# Altium PCB FeedbackCC2.PcbDoc
Units mm, origin at the board's own origin, x right, y up, seen from the top; angles counter-clockwise.
Board outline 40 x 35 mm, 2 copper layers (Top Layer, Bottom Layer); 19 components, 17 nets, 48 pads, 5 vias.
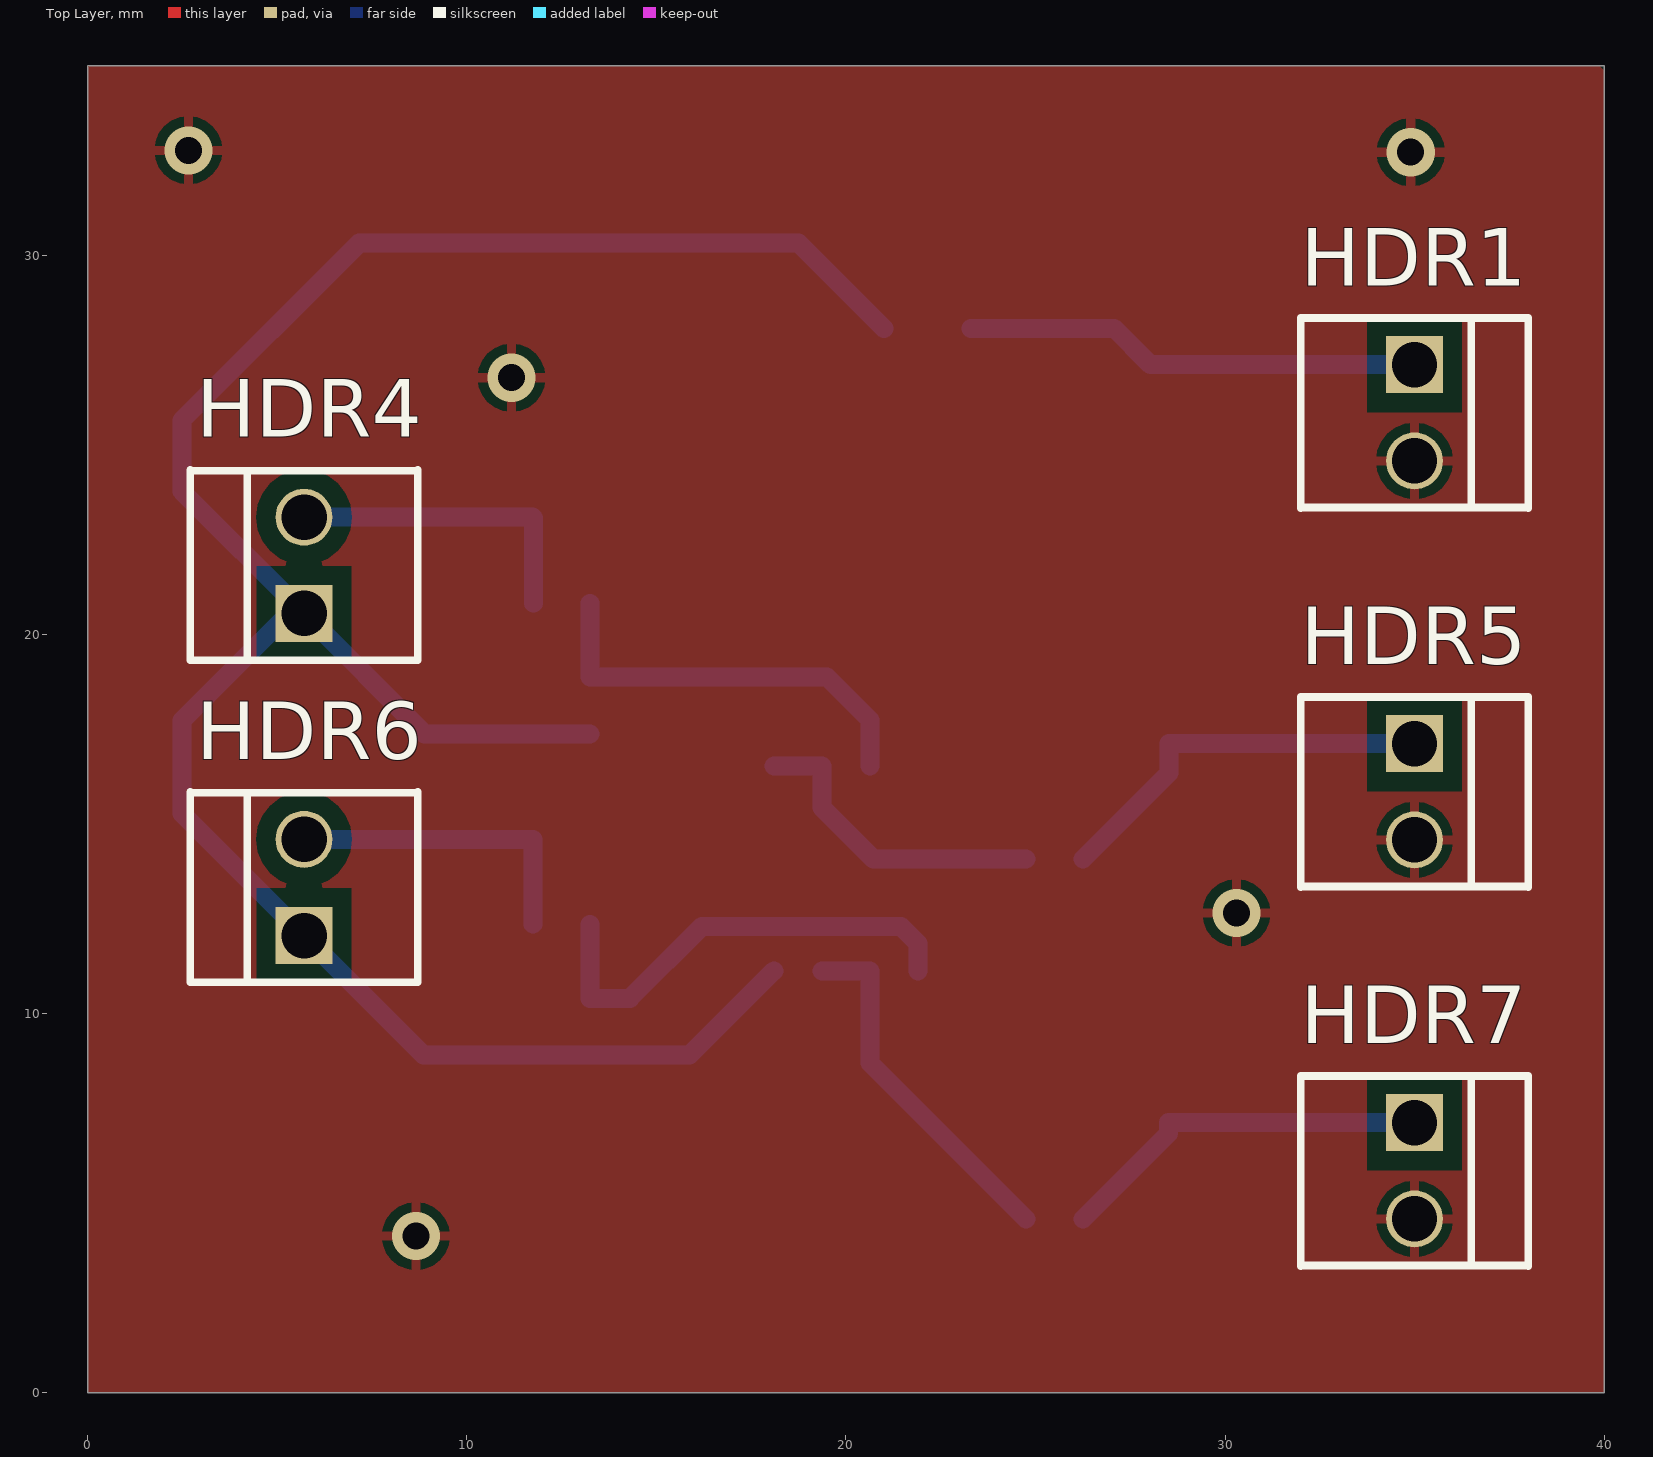
[diagram p0: Top Layer view]
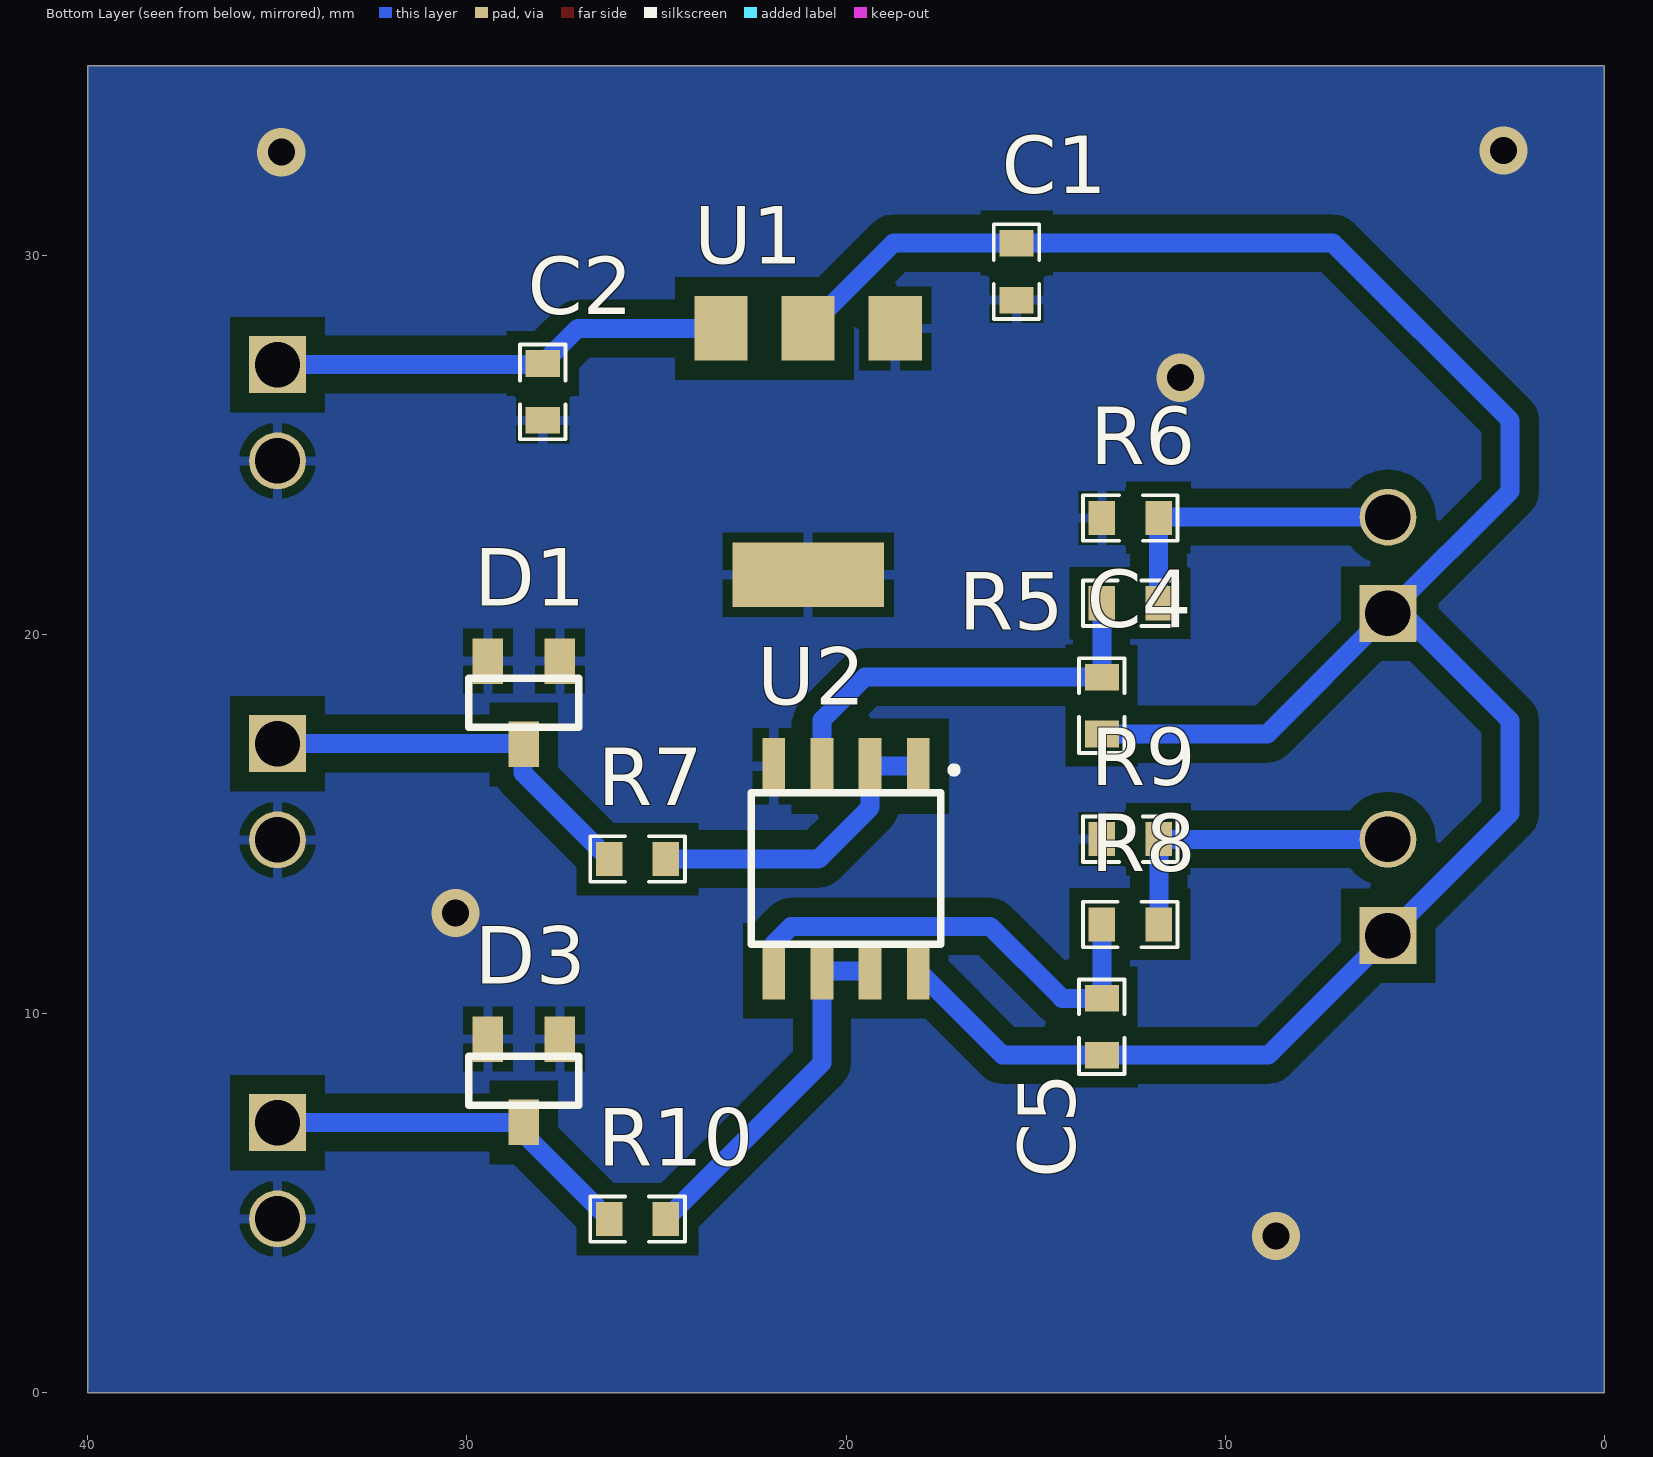
[diagram p1: Bottom Layer view, seen from below]
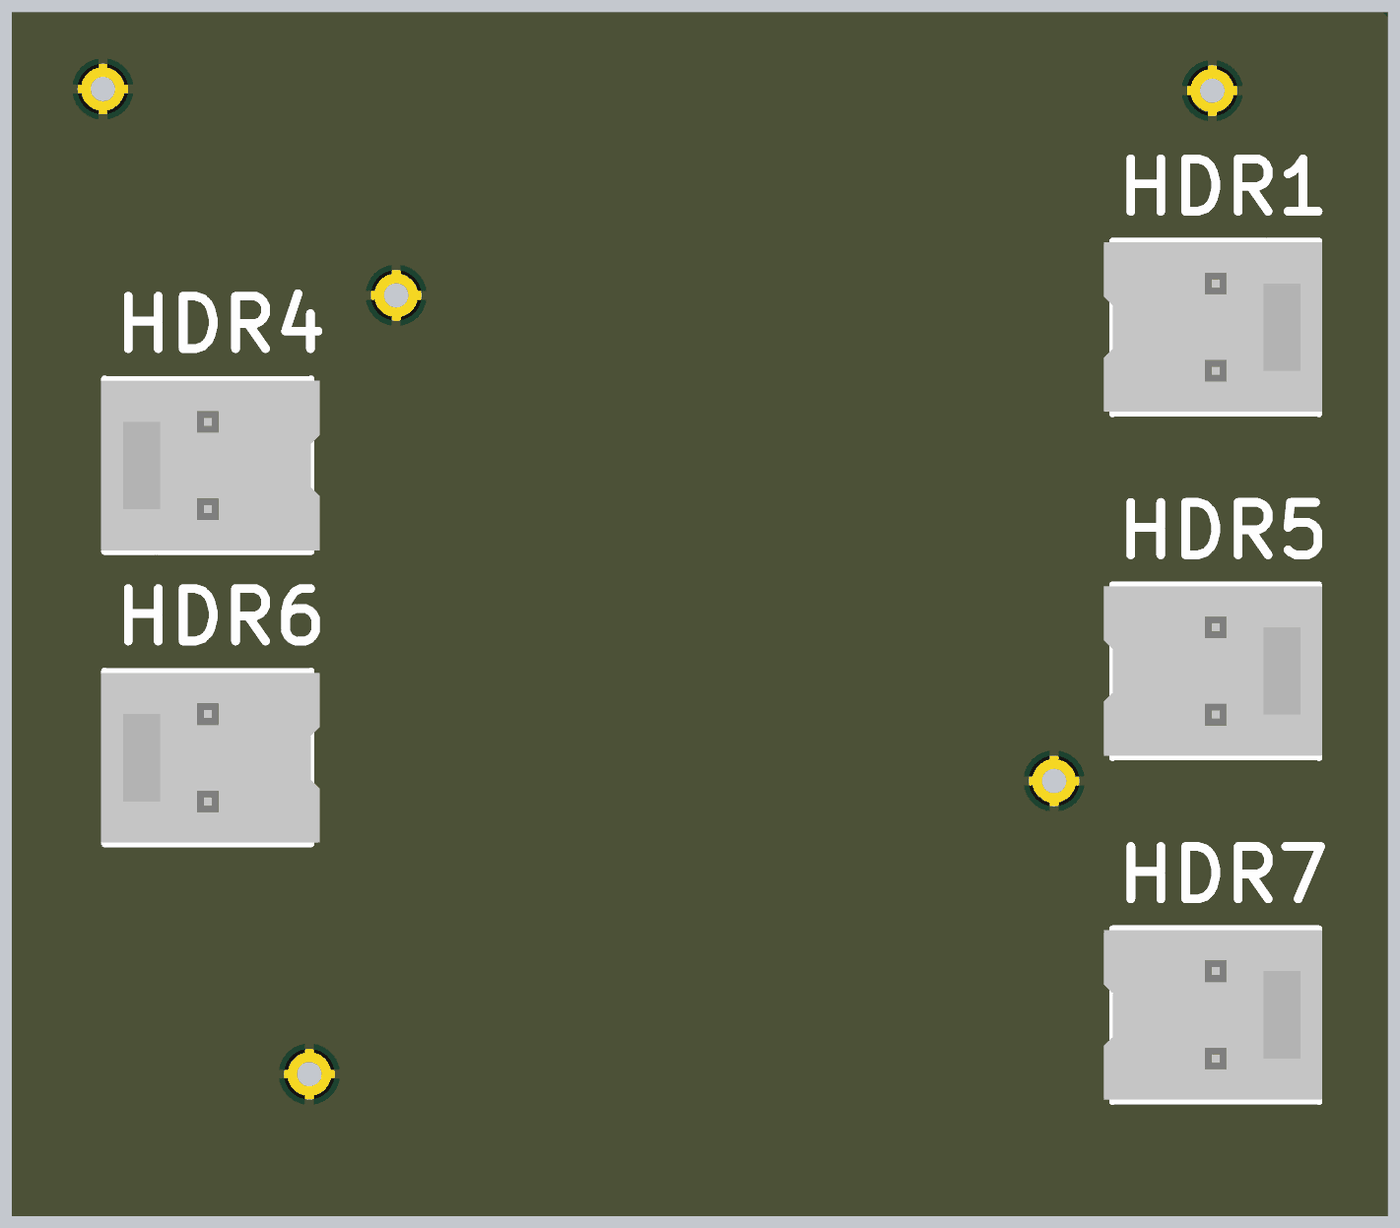
[diagram p2: 3D render of the assembled board from above, using the file's embedded part models]
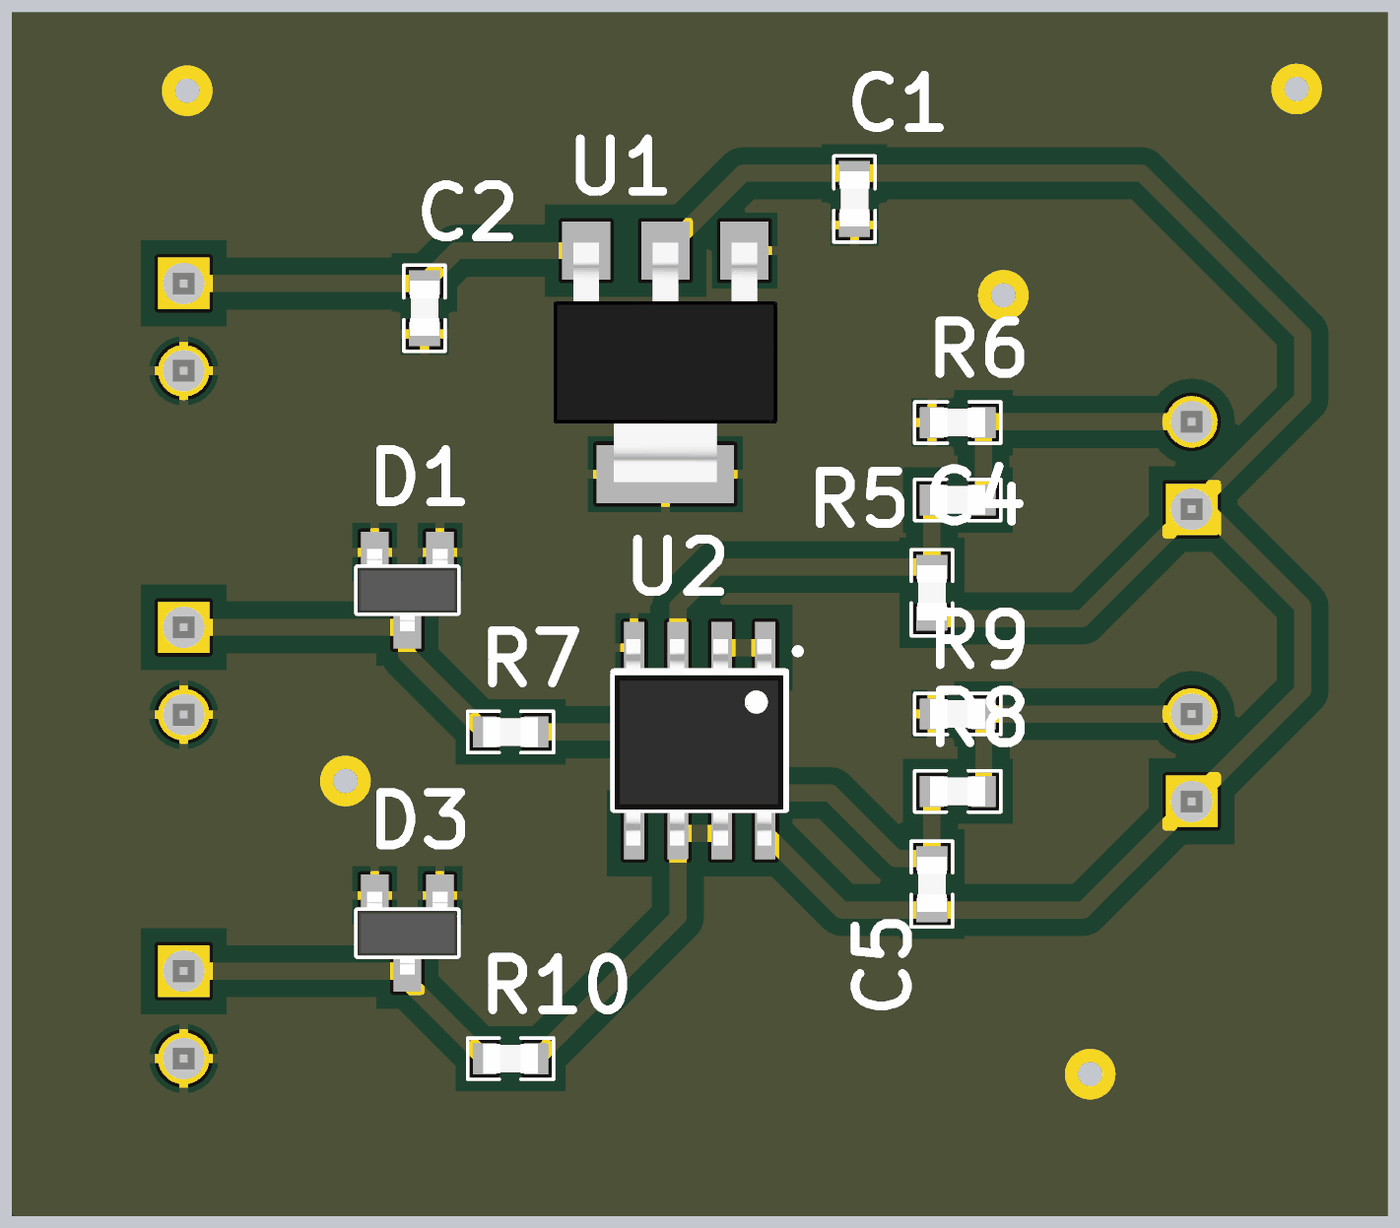
[diagram p3: 3D render of the assembled board from below, using the file's embedded part models]

## Layer stack, top to bottom
Top Solder: solder mask 0.0102, Solder Resist, Dk 3.5
Top Layer: signal copper 0.0356
Dielectric 1: dielectric 0.32, FR-4, Dk 4.8
Bottom Layer: signal copper 0.0356
Bottom Solder: solder mask 0.0102, Solder Resist, Dk 3.5

## Board outline
0,0 40,0 40,35 0,35

## Design rules (kind name [scope] priority, off if disabled: settings)
Clearance [All] p1: gap=0.5
PolygonConnect [All] p1: connectstyle=Relief reliefconductorwidth=0.254 reliefentries=4 polygonreliefangle="90 Angle" airgapwidth=0.254
RoutingVias [All] p1: holewidth=0.711 width=1.27 viastyle="Through Hole" minholewidth=0.711 minwidth=1.27 maxholewidth=0.711 maxwidth=1.27
SolderMaskExpansion [All] p1: expansion=0.102
UnpouredPolygon [All] p1: allowunpoured=FALSE
Width [All] p1: maxlimit=0.254 minlimit=0.254 preferedwidth=0.254
29 further rules are at their usual default settings.

## Components (designator, comment, footprint, x,y, rotation, side; value= is the part's Value field where it differs from the comment)
C1 "0.1uF" 0603 15.5,29.575 r270 bottom
C2 "0.33uF" 0603 28,26.4 r270 bottom
C4 "1uF" 0603 13.25,18.125 r90 bottom
C5 "1uF" 0603 13.25,9.65 r90 bottom
D1 "D. Zener - SOT23-3 2NC" SOT-23-3 28.5,18.2 r0 bottom
D3 "D. Zener - SOT23-3 2NC" SOT-23-3 28.5,8.225 r0 bottom
HDR1 "Header 1x2" HEADER-1X2-KK 35,25.85 r270 top
HDR4 "Header 1x2" HEADER-1X2-KK 5.7,21.825 r90 top
HDR5 "Header 1x2" HEADER-1X2-KK 35,15.85 r270 top
HDR6 "Header 1x2" HEADER-1X2-KK 5.7,13.325 r90 top
HDR7 "Header 1x2" HEADER-1X2-KK 35,5.85 r270 top
R5 "47KR" 0603 12.5,20.825 r0 bottom
R6 "10KR" 0603 12.5,23.075 r180 bottom
R7 "1KR" 0603 25.5,14.075 r0 bottom
R8 "47KR" 0603 12.5,12.35 r0 bottom
R9 "10KR" 0603 12.5,14.6 r180 bottom
R10 "1KR" 0603 25.5,4.575 r0 bottom
U1 "VoltReg-5V" SOT-223 21,24.825 r0 bottom
U2 "AmpOp-2u" SOIC-8 20,13.825 r0 bottom

## Footprints (in the part's own frame and the unit in brackets; to place one, negate y for a bottom-side part, rotate by r counter-clockwise, add the part's x,y. Pads: shape width x height; smd on the part's side, far side on the other; paste and mask are expansions set on the pad)
0603 [mm]
  rect 0.7x0.9 smd: 1(-0.75,0) 2(0.75,0)
  silkscreen extent -1.25,-0.6 1.25,0.6, body extent -0.8,-0.43 0.8,0.43, height 0.87
HEADER-1X2-KK [mm]
  rect 1.5x1.5 hole 1.2: 1(-1.27,0)
  round 1.5 hole 1.2: 2(1.27,0)
  silkscreen extent -2.5,-3 2.52,3, body extent -2.46,-3.25 2.46,3.1, height 10.68
SOIC-8 [mm]
  rect 0.6x1.5 smd: 1(-1.905,-2.7) 2(-0.635,-2.7) 3(0.635,-2.7) 4(1.905,-2.7) 5(1.905,2.7) 6(0.635,2.7) 7(-0.635,2.7) 8(-1.905,2.7)
  silkscreen extent -2.92,-2.67 2.5,2, body extent -2.42,-2.95 2.48,3.05, height 1.75
SOT-23-3 [mm]
  rect 0.8x1.2 smd: 1(-0.95,-1.1) 2(0.95,-1.1) 3(0,1.1)
  silkscreen extent -1.45,-0.65 1.45,0.65, body extent -1.45,-1.2 1.45,1.2, height 1.02
SOT-223 [mm]
  rect 4x1.7 smd: 0(0,3.25)
  rect 1.4x1.7 smd: 1(-2.3,-3.25) 2(0,-3.25) 3(2.3,-3.25)
  body extent -3.25,-3.48 3.25,3.48, height 1.69

## Part data
C1 C2 C4 C5: library part Capacitor-1, "Capacitor"
D1 D3: "Zener Diode SOT23 - 2NC"
HDR1 HDR4 HDR5 HDR6 HDR7: "Header 1X2"
R5 R6 R7 R8 R9 R10: library part Resistor-1, "Resistor"
U1: "CI Voltage Regulator 5V"
U2: "AmpOp Single Supply IC Rail-to-Rail with 2 units"

## Via types
v1: diameter 1.27, hole 0.711, Top Layer to Bottom Layer, 5 vias

## Nets (pads, with @x,y where several pads share a name; then routed paths per layer and width w, separated by ;. In a path a pad name is that pad's centre, name@x,y a point inside that pad or via, vN(x,y) a via of type N, cw(c..) or ccw(c..) an arc to the next point about the centre after c; other vN are vias at no path point)
GND: C1.2 C2.2 D1.1 D1.2 D3.1 D3.2 HDR1.2 HDR5.2 HDR7.2 R6.1 R9.1 U1.0 U1.1 U2.4
  other v1: 8.65,4.125 30.3,12.65 11.175,26.775 34.9,32.725 2.65,32.775
NetC3_1: 
NetC4_2: C4.2 R5.2 U2.3 | length 11
  Bottom Layer w0.5: R5.2 C4.2 19.5,18.875 20.635,17.74 U2.3
NetC5_2: C5.2 R8.2 U2.5 | length 12.3
  Bottom Layer w0.5: R8.2 C5.2 14.3,10.4 16.2,12.3 21.45,12.3 21.905,11.845 U2.5
NetD1_3: D1.3 HDR5.1 R7.2 | length 10.5
  Bottom Layer w0.5: R7.2 28.52,16.345 28.52,17.12 HDR5.1
NetD2_3: 
NetD3_3: D3.3 HDR7.1 R10.2 | length 10
  Bottom Layer w0.5: R10.2 28.505,6.83 28.505,7.12 HDR7.1
NetHDR2_2: 
NetHDR4_2: HDR4.2 R5.1 R6.2 | length 8.3
  Bottom Layer w0.5: HDR4.2 11.73,23.095 R6.2 R5.1
NetHDR6_2: HDR6.2 R8.1 R9.2 | length 8.3
  Bottom Layer w0.5: HDR6.2 11.745,14.595 R8.1@11.745,12.355
NetR2_1: 
NetR3_1: 
NetR7_1: R7.1 U2.1 U2.2 | length 8.3
  Bottom Layer w0.5: U2.1 U2.2 19.365,15.435 20.725,14.075 R7.1
NetR10_1: R10.1 U2.6 U2.7 | length 9.5
  Bottom Layer w0.5: U2.7 U2.6 20.635,8.69 R10.1
NetR11_2: 
VCC: C1.1 C4.1 C5.1 HDR4.1 HDR6.1 U1.2 U2.8 | length 62.7
  Bottom Layer w0.5: C4.1 8.88,17.375 HDR4.1 ; U2.8 15.87,8.9 C5.1 8.855,8.9 HDR6.1 2.475,15.28 2.475,17.725 5.305,20.555 HDR4.1 ; U1.2 18.75,30.325 C1.1 7.15,30.325 2.475,25.65 2.475,23.78 HDR4.1
VIN: C2.1 HDR1.1 U1.3 | length 12.1
  Bottom Layer w0.5: U1.3 27.075,28.075 C2.1 28.03,27.12 HDR1.1

## Polygon pours and split planes (outlines as drawn)
GND on Bottom Layer "GND" (solid, pour order 2): 40,35 0,35 0,0 40,0
GND on Top Layer "GND" (solid, pour order 3): 0,35 0,0 40,0 40,35